# Allegro board Balang_Ctrl_V1_0_20190624.brd
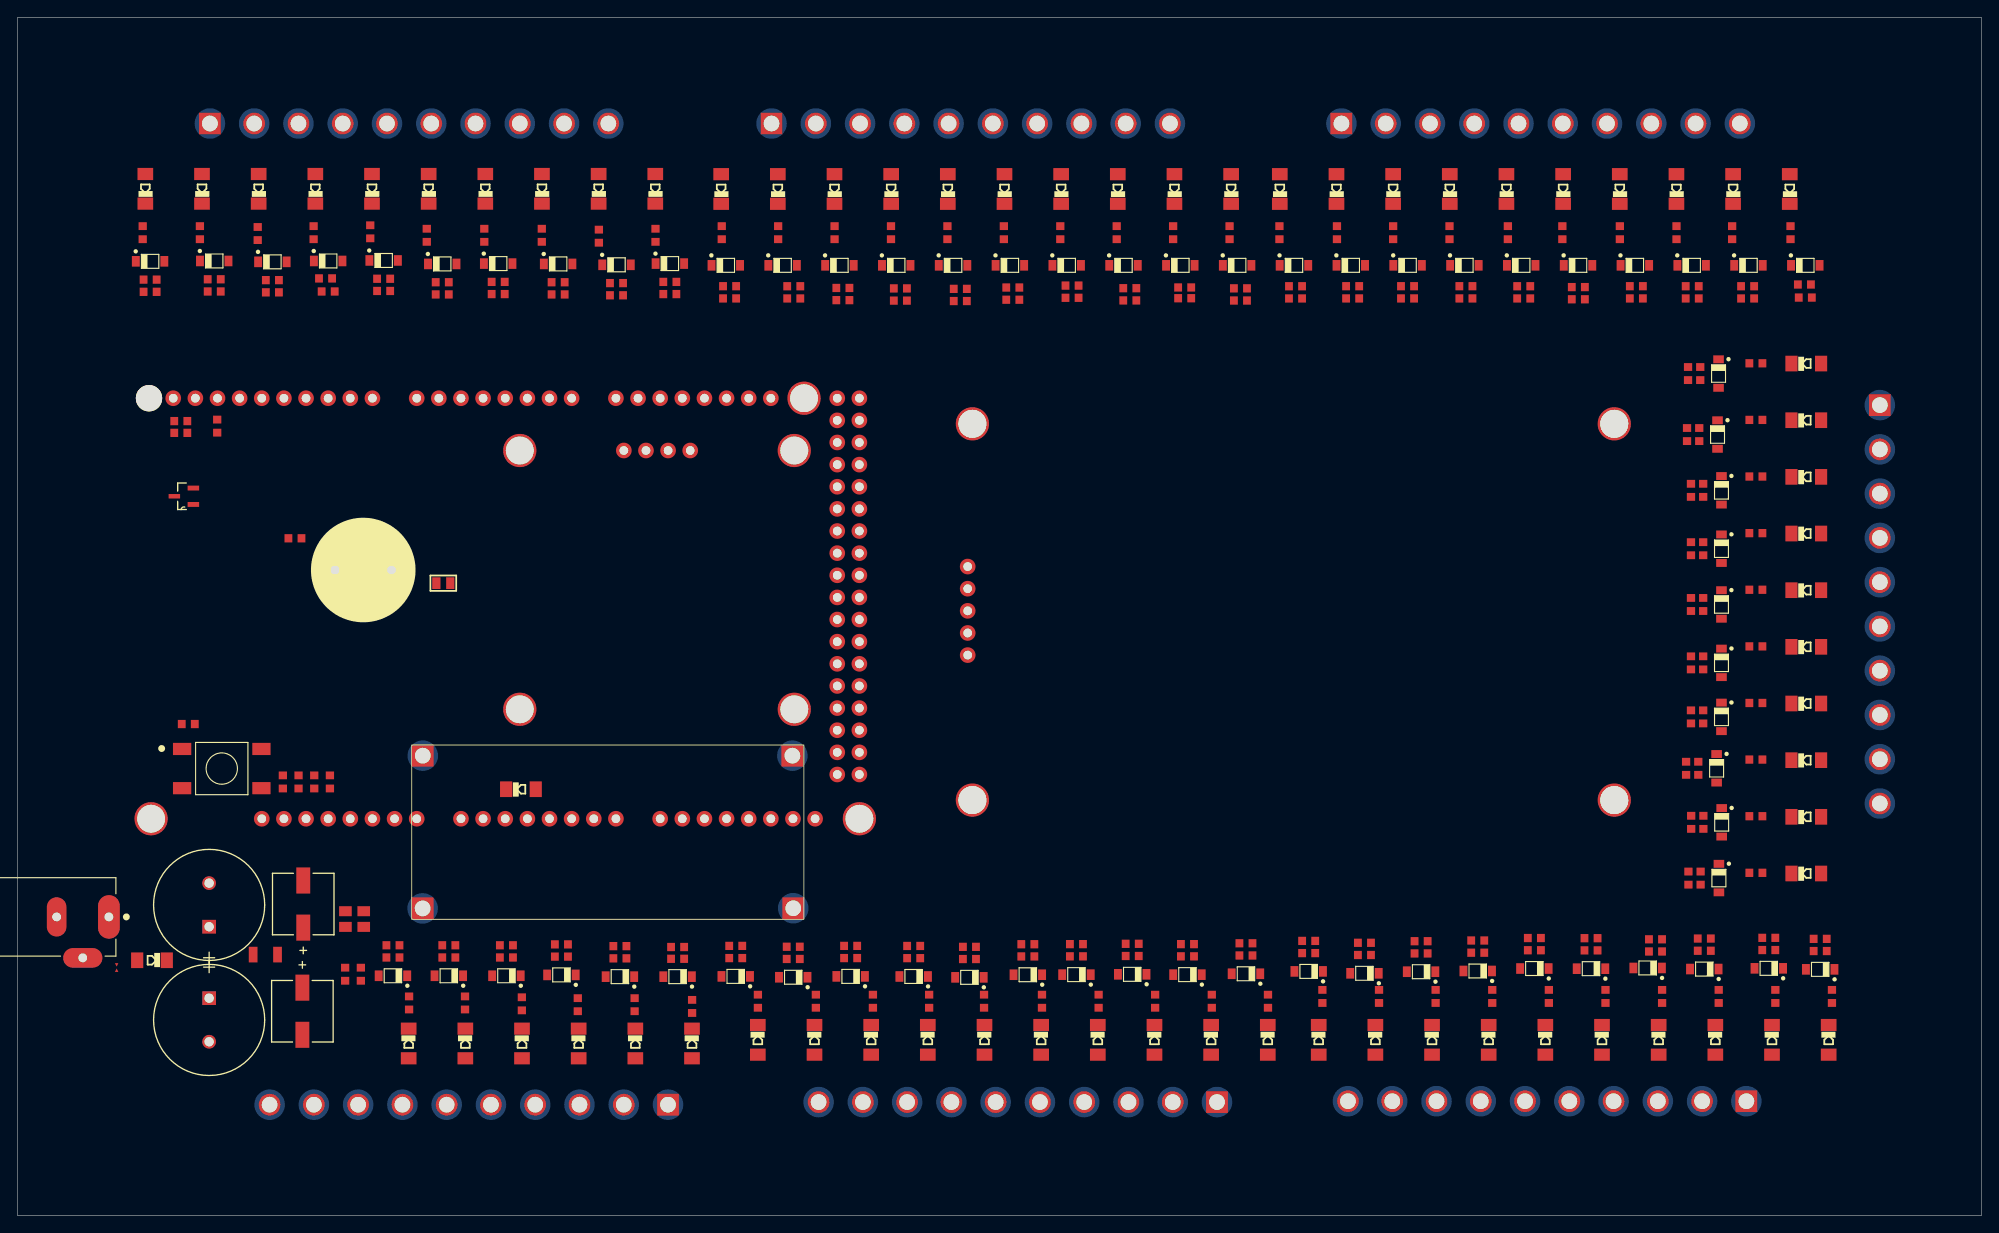
[diagram p0: board, top side]
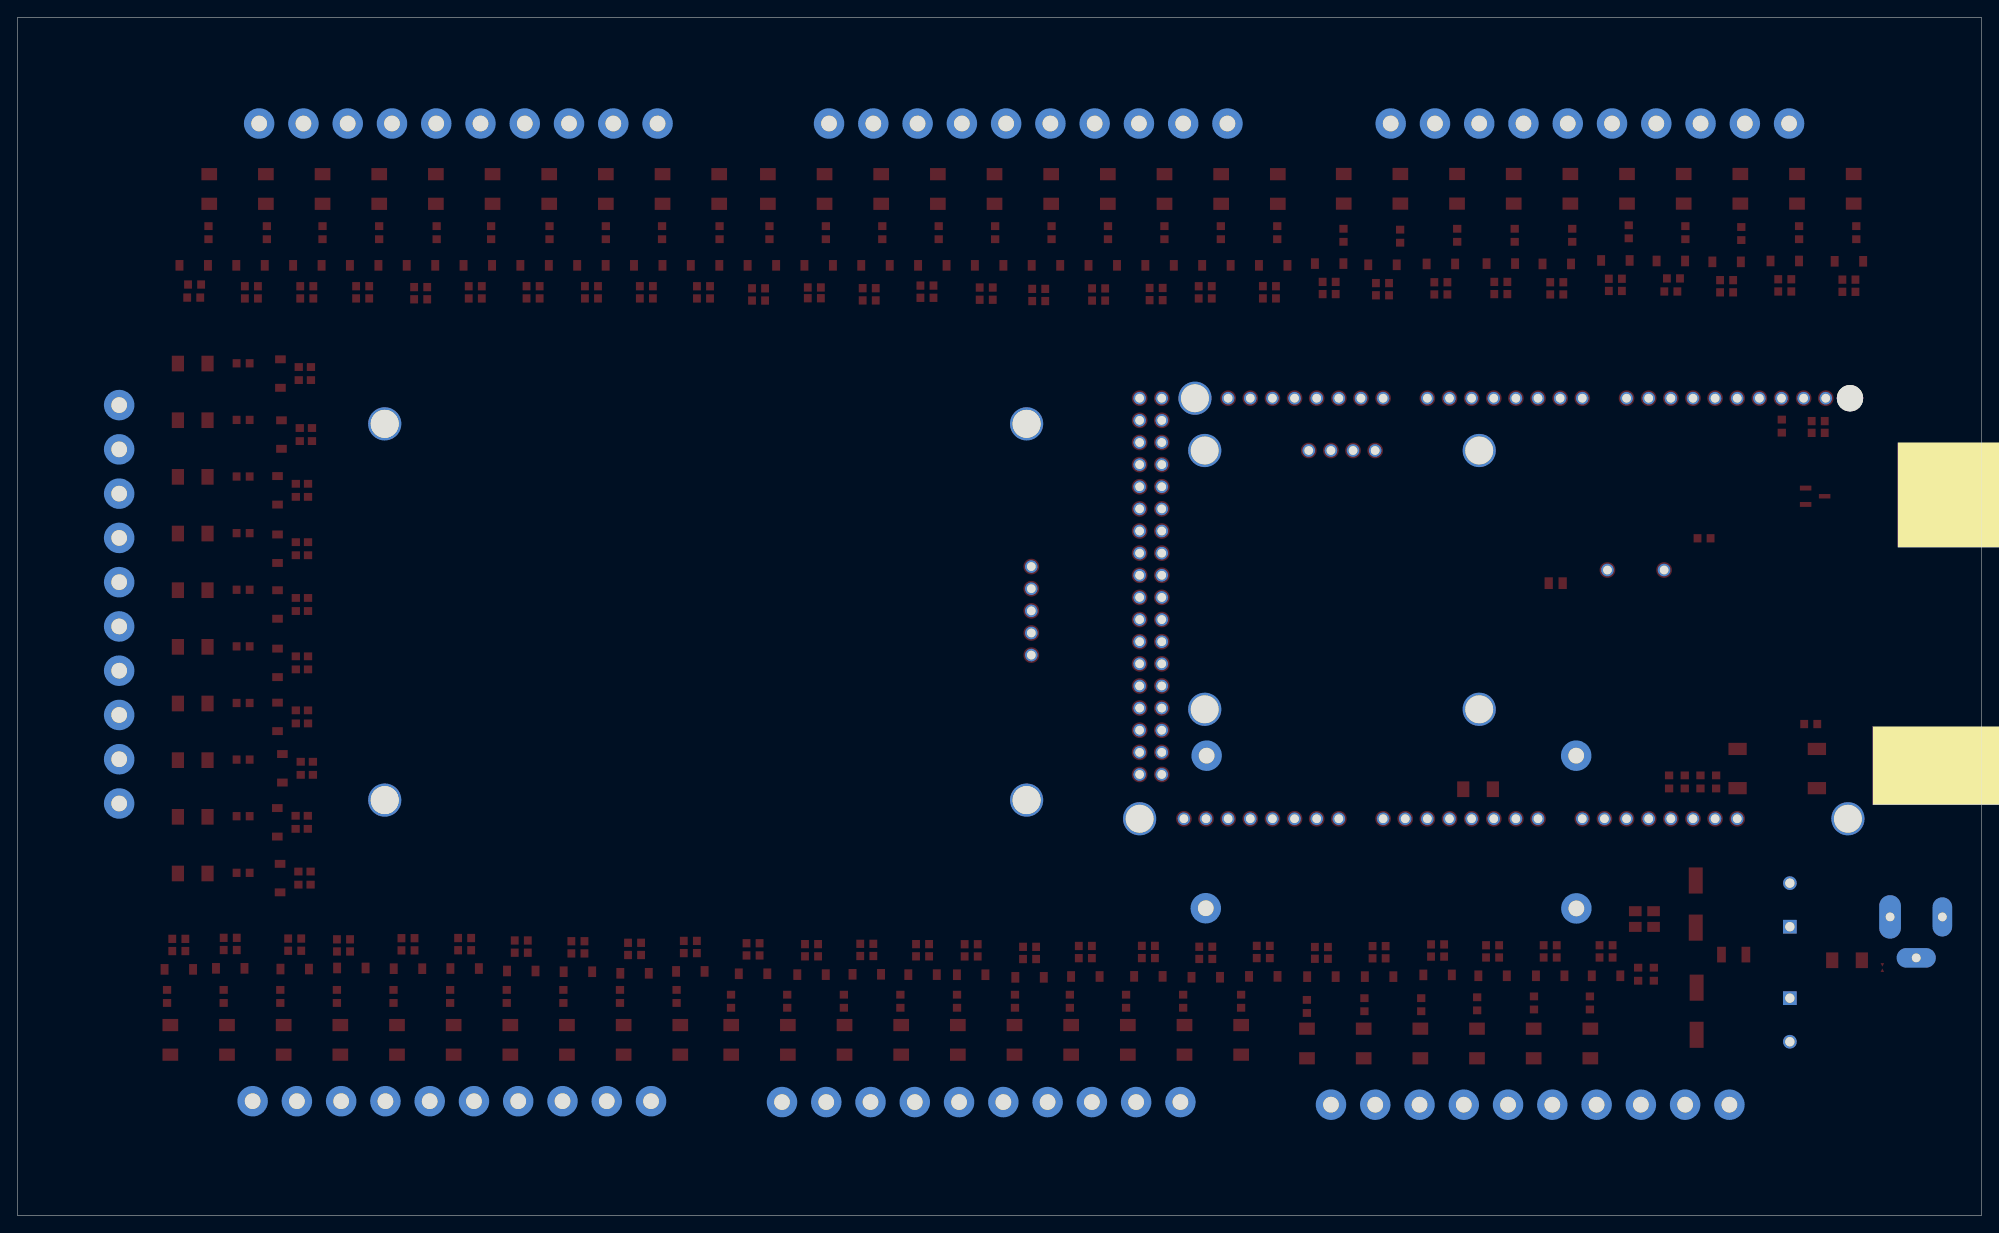
[diagram p1: board, bottom side, seen from below]

Outline 225.4 x 137.5 mm; copper layers: TOP, BOTTOM. Coordinates in mm from the lower left corner of the outline.
Outline path: 0,137.5 0,0 225.4,0 225.4,137.5 0,137.5

## Placement (name value [footprint] x y rotation side)
C1  100n  [CC0603]  19.61 56.41 0 top
C2  100n  [CC0603]  75.76 29.47 180 top
C3  100n  [CC0603]  69.14 29.52 180 top
C4  100n  [CC0603]  62.43 29.72 180 top
C5  100n  [CC0603]  56.12 29.62 180 top
C6  100n  [CC0603]  49.5 29.62 180 top
C7  100n  [CC0603]  43.09 29.62 180 top
C8  100n  [CC0603]  140.98 29.85 180 top
C9  100n  [CC0603]  134.27 29.75 180 top
C10  100n  [CC0603]  127.93 29.79 180 top
C11  100n  [CC0603]  121.53 29.75 180 top
C12  100n  [CC0603]  115.95 29.74 180 top
C13  100n  [CC0603]  109.25 29.44 180 top
C14  100n  [CC0603]  102.85 29.54 180 top
C15  100n  [CC0603]  95.62 29.55 180 top
C16  100n  [CC0603]  89.03 29.45 180 top
C17  100n  [CC0603]  82.43 29.55 180 top
C18  100n  [CC0603]  32.26 49.77 270 top
C19  100n  [CC0603]  34.06 49.77 270 top
C20  1000uF  [U1-Z]  22 24.95 270 top
C21  1000uF  [U1-Z]  22 33.15 90 top
C22  100uF  [PCAP_6P3X7P7-ELECT]  32.8 35.75 90 top
C23  100uF  [PCAP_6P3X7P7-ELECT]  32.7 23.45 270 top
C24  10uF  [CC0805]  39.74 34.03 90 top
C25  10uF  [CC0805]  37.64 34.03 90 top
C26  100n  [CC0603]  39.41 27.7 270 top
C27  100n  [CC0603]  37.61 27.7 270 top
C28  100n  [CC0603]  74.87 107.15 0 top
C29  100n  [CC0603]  68.75 107.01 0 top
C30  100n  [CC0603]  62.05 107.11 0 top
C32  100n  [CC0603]  140.35 106.41 0 top
C33  100n  [CC0603]  148.18 30.12 180 top
C34  100n  [CC0603]  205.07 106.85 0 top
C35  100n  [CC0603]  193.16 38.73 270 top
C36  100n  [CC0603]  55.17 107.15 0 top
C37  100n  [CC0603]  133.95 106.51 0 top
C38  100n  [CC0603]  154.58 29.9 180 top
C39  100n  [CC0603]  198.55 106.65 0 top
C40  100n  [CC0603]  193.48 45.13 270 top
C41  100n  [CC0603]  48.75 107.11 0 top
C42  100n  [CC0603]  127.65 106.42 0 top
C43  100n  [CC0603]  161.08 30.09 180 top
C44  100n  [CC0603]  192.2 106.65 0 top
C45  100n  [CC0603]  192.89 51.33 270 top
C46  100n  [CC0603]  42.02 107.51 0 top
C47  100n  [CC0603]  121.02 106.72 0 top
C48  100n  [CC0603]  167.58 31.57 180 top
C49  100n  [CC0603]  185.78 106.65 0 top
C50  100n  [CC0603]  193.45 57.23 270 top
C51  100n  [CC0603]  35.36 107.55 0 top
C52  100n  [CC0603]  114.22 106.5 0 top
C53  100n  [CC0603]  193.45 63.43 270 top
C54  100n  [CC0603]  174.08 30.45 180 top
C55  100n  [CC0603]  179.12 106.55 0 top
C56  100n  [CC0603]  29.26 107.35 0 top
C57  100n  [CC0603]  108.2 106.35 0 top
C58  100n  [CC0603]  180.58 30.43 180 top
C59  100n  [CC0603]  172.86 106.65 0 top
C60  100n  [CC0603]  193.45 70.13 270 top
C61  100n  [CC0603]  22.58 107.45 0 top
C62  100n  [CC0603]  101.32 106.4 0 top
C63  100n  [CC0603]  187.98 30.31 180 top
C64  100n  [CC0603]  166.22 106.65 0 top
C65  100n  [CC0603]  193.45 76.53 270 top
C66  100n  [CC0603]  15.22 107.41 0 top
C67  100n  [CC0603]  94.72 106.45 0 top
C68  100n  [CC0603]  193.58 30.39 180 top
C69  100n  [CC0603]  159.52 106.65 0 top
C70  100n  [CC0603]  193.45 83.23 270 top
C71  100n  [CC0603]  89.09 106.65 0 top
C72  100n  [CC0603]  200.98 30.47 180 top
C73  100n  [CC0603]  153.22 106.65 0 top
C74  100n  [CC0603]  193 89.63 270 top
C75  100n  [CC0603]  81.72 106.65 0 top
C76  100n  [CC0603]  206.88 30.36 180 top
C77  100n  [CC0603]  146.67 106.65 0 top
C78  100n  [CC0603]  193.12 96.63 270 top
D1  DIODE  [MINIMELF]  77.41 19.75 270 top
D2  DIODE  [MINIMELF]  70.91 19.75 270 top
D3  DIODE  [MINIMELF]  64.41 19.75 270 top
D4  DIODE  [MINIMELF]  57.9 19.75 270 top
D5  DIODE  [MINIMELF]  51.4 19.75 270 top
D6  DIODE  [MINIMELF]  44.9 19.75 270 top
D7  DIODE  [MINIMELF]  143.49 20.17 270 top
D8  DIODE  [MINIMELF]  136.99 20.17 270 top
D9  DIODE  [MINIMELF]  130.48 20.17 270 top
D10  DIODE  [MINIMELF]  123.98 20.17 270 top
D11  DIODE  [MINIMELF]  117.48 20.17 270 top
D12  DIODE  [MINIMELF]  110.98 20.17 270 top
D13  DIODE  [MINIMELF]  104.48 20.17 270 top
D14  DIODE  [MINIMELF]  97.97 20.17 270 top
D15  DIODE  [MINIMELF]  91.47 20.17 270 top
D16  DIODE  [MINIMELF]  84.97 20.17 270 top
D17  ZEN  [SOD3716X117N]  75.76 27.42 180 top
D18  ZEN  [SOD3716X117N]  69.14 27.42 180 top
D19  ZEN  [SOD3716X117N]  62.43 27.62 180 top
D20  ZEN  [SOD3716X117N]  56.12 27.52 180 top
D21  ZEN  [SOD3716X117N]  49.5 27.52 180 top
D22  ZEN  [SOD3716X117N]  43.09 27.52 180 top
D23  ZEN  [SOD3716X117N]  140.98 27.75 180 top
D24  ZEN  [SOD3716X117N]  134.27 27.65 180 top
D25  ZEN  [SOD3716X117N]  127.93 27.69 180 top
D26  ZEN  [SOD3716X117N]  121.53 27.65 180 top
D27  ZEN  [SOD3716X117N]  115.95 27.64 180 top
D28  ZEN  [SOD3716X117N]  109.25 27.34 180 top
D29  ZEN  [SOD3716X117N]  102.85 27.44 180 top
D30  ZEN  [SOD3716X117N]  95.62 27.45 180 top
D31  ZEN  [SOD3716X117N]  89.03 27.35 180 top
D32  ZEN  [SOD3716X117N]  82.43 27.45 180 top
D33  DIODE 34/DD  [MINIMELF]  15.44 29.3 180 top
D34  DIODE  [MINIMELF]  57.78 48.93 0 top
D35  DIODE  [MINIMELF]  73.2 117.83 90 top
D36  ZEN  [SOD3716X117N]  74.87 109.25 0 top
D37  DIODE  [MINIMELF]  66.7 117.83 90 top
D38  ZEN  [SOD3716X117N]  68.75 109.11 0 top
D39  DIODE  [MINIMELF]  60.19 117.83 90 top
D40  ZEN  [SOD3716X117N]  62.05 109.21 0 top
D42  DIODE  [MINIMELF]  139.28 117.81 90 top
D43  DIODE  [MINIMELF]  149.33 20.17 270 top
D44  DIODE  [MINIMELF]  203.39 117.81 90 top
D45  DIODE  [MINIMELF]  205.28 39.26 0 top
D46  ZEN  [SOD3716X117N]  139.97 109.05 0 top
D47  DIODE  [MINIMELF]  53.69 117.83 90 top
D48  ZEN  [SOD3716X117N]  148.18 28.02 180 top
D49  ZEN  [SOD3716X117N]  205.17 109.05 0 top
D50  ZEN  [SOD3716X117N]  195.26 38.73 270 top
D51  ZEN  [SOD3716X117N]  55.17 109.25 0 top
D52  DIODE  [MINIMELF]  132.78 117.81 90 top
D53  DIODE  [MINIMELF]  196.89 117.81 90 top
D54  DIODE  [MINIMELF]  155.83 20.17 270 top
D55  DIODE  [MINIMELF]  205.28 45.76 0 top
D56  ZEN  [SOD3716X117N]  133.45 109.05 0 top
D57  DIODE  [MINIMELF]  47.19 117.83 90 top
D58  ZEN  [SOD3716X117N]  154.58 27.8 180 top
D59  ZEN  [SOD3716X117N]  198.65 109.05 0 top
D60  ZEN  [SOD3716X117N]  195.58 45.13 270 top
D61  ZEN  [SOD3716X117N]  48.75 109.21 0 top
D62  DIODE  [MINIMELF]  126.28 117.81 90 top
D63  DIODE  [MINIMELF]  162.34 20.17 270 top
D64  DIODE  [MINIMELF]  190.38 117.81 90 top
D65  DIODE  [MINIMELF]  205.28 52.26 0 top
D66  ZEN  [SOD3716X117N]  126.93 109.05 0 top
D67  DIODE  [MINIMELF]  40.69 117.83 90 top
D68  ZEN  [SOD3716X117N]  161.08 27.99 180 top
D69  ZEN  [SOD3716X117N]  192.13 109.05 0 top
D70  ZEN  [SOD3716X117N]  194.99 51.33 270 top
D71  ZEN  [SOD3716X117N]  42.02 109.61 0 top
D72  DIODE  [MINIMELF]  119.77 117.81 90 top
D73  DIODE  [MINIMELF]  168.84 20.17 270 top
D74  DIODE  [MINIMELF]  183.88 117.81 90 top
D75  DIODE  [MINIMELF]  205.28 58.77 0 top
D76  ZEN  [SOD3716X117N]  120.41 109.05 0 top
D77  DIODE  [MINIMELF]  34.19 117.83 90 top
D78  ZEN  [SOD3716X117N]  167.58 28.07 180 top
D79  ZEN  [SOD3716X117N]  185.61 109.05 0 top
D80  ZEN  [SOD3716X117N]  195.55 57.23 270 top
D81  ZEN  [SOD3716X117N]  35.66 109.55 0 top
D82  DIODE  [MINIMELF]  113.27 117.81 90 top
D83  DIODE  [MINIMELF]  205.28 65.27 0 top
D84  DIODE  [MINIMELF]  175.34 20.17 270 top
D85  DIODE  [MINIMELF]  177.38 117.81 90 top
D86  ZEN  [SOD3716X117N]  113.89 109.05 0 top
D87  DIODE  [MINIMELF]  27.68 117.83 90 top
D88  ZEN  [SOD3716X117N]  174.08 28.35 180 top
D89  ZEN  [SOD3716X117N]  179.09 109.05 0 top
D90  ZEN  [SOD3716X117N]  195.55 63.43 270 top
D91  ZEN  [SOD3716X117N]  29.26 109.45 0 top
D92  DIODE  [MINIMELF]  106.77 117.81 90 top
D93  DIODE  [MINIMELF]  181.84 20.17 270 top
D94  DIODE  [MINIMELF]  170.88 117.81 90 top
D95  DIODE  [MINIMELF]  205.28 71.77 0 top
D96  ZEN  [SOD3716X117N]  107.37 109.05 0 top
D97  DIODE  [MINIMELF]  21.18 117.83 90 top
D98  ZEN  [SOD3716X117N]  180.58 28.33 180 top
D99  ZEN  [SOD3716X117N]  172.57 109.05 0 top
D100  ZEN  [SOD3716X117N]  195.55 70.13 270 top
D101  ZEN  [SOD3716X117N]  22.58 109.55 0 top
D102  DIODE  [MINIMELF]  100.27 117.81 90 top
D103  DIODE  [MINIMELF]  188.35 20.17 270 top
D104  DIODE  [MINIMELF]  164.37 117.81 90 top
D105  DIODE  [MINIMELF]  205.28 78.27 0 top
D106  ZEN  [SOD3716X117N]  100.85 109.05 0 top
D107  DIODE  [MINIMELF]  14.68 117.83 90 top
D108  ZEN  [SOD3716X117N]  187.08 28.41 180 top
D109  ZEN  [SOD3716X117N]  166.05 109.05 0 top
D110  ZEN  [SOD3716X117N]  195.55 76.53 270 top
D111  ZEN  [SOD3716X117N]  15.22 109.51 0 top
D113  DIODE  [MINIMELF]  93.76 117.81 90 top
D114  DIODE  [MINIMELF]  194.85 20.17 270 top
D115  DIODE  [MINIMELF]  157.87 117.81 90 top
D116  DIODE  [MINIMELF]  205.28 84.77 0 top
D117  ZEN  [SOD3716X117N]  94.33 109.05 0 top
D118  ZEN  [SOD3716X117N]  193.58 28.29 180 top
D119  ZEN  [SOD3716X117N]  159.53 109.05 0 top
D120  ZEN  [SOD3716X117N]  195.55 83.23 270 top
D121  DIODE  [MINIMELF]  87.26 117.81 90 top
D122  DIODE  [MINIMELF]  201.35 20.17 270 top
D123  DIODE  [MINIMELF]  151.37 117.81 90 top
D125  DIODE  [MINIMELF]  205.28 91.28 0 top
D126  ZEN  [SOD3716X117N]  87.81 109.05 0 top
D127  ZEN  [SOD3716X117N]  200.98 28.37 180 top
D128  ZEN  [SOD3716X117N]  153.01 109.05 0 top
D129  ZEN  [SOD3716X117N]  195.1 89.63 270 top
D130  DIODE  [MINIMELF]  80.76 117.81 90 top
D131  DIODE  [MINIMELF]  207.85 20.17 270 top
D132  DIODE  [MINIMELF]  144.87 117.81 90 top
D133  DIODE  [MINIMELF]  205.28 97.78 0 top
D134  ZEN  [SOD3716X117N]  81.29 109.05 0 top
D135  ZEN  [SOD3716X117N]  206.88 28.26 180 top
D136  ZEN  [SOD3716X117N]  146.49 109.05 0 top
D137  ZEN  [SOD3716X117N]  195.22 96.63 270 top
F2  1206L012WR  [FUSER_1206L012WR]  28.45 29.95 0 top
J1  TerminalBlock  [TERMINALBLOCK508]  89.9 12.73 180 top
J2  TerminalBlock  [TERMINALBLOCK508]  152.9 13.02 180 top
J3  Rst  [SW_5-1437565-0]  23.45 51.3 0 top
J4  TerminalBlock  [TERMINALBLOCK508]  6.85 125.32 0 top
J5  TerminalBlock  [TERMINALBLOCK508]  213.65 13.12 180 top
J6  TerminalBlock  [TERMINALBLOCK508]  213.73 108.25 270 top
J7  TerminalBlock  [TERMINALBLOCK508]  136.7 125.32 0 top
J8  TerminalBlock  [TERMINALBLOCK508]  71.3 125.32 0 top
K1  CAP_KeyPad  [CAP_KEYPAD]  107.05 93.4 270 top
L1  OLED  [OLED_1_3INCH]  55.65 56.1 0 top
LS1  BUZZER  [BUZZER5V]  36.43 74.09 0 top
NOREF  -  []  -160.45 -203.35 0 top
Q1  IRF150  [SOT95P237X112-3N]  19.1 82.55 180 top
R1  100k  [RC0603]  35.86 49.77 270 top
R2  100k  [RC0603]  22.93 90.6 90 top
R3  1k  [RC0603]  77.42 24 270 top
R4  1k  [RC0603]  70.83 24.2 270 top
R5  1k  [RC0603]  64.31 24.2 270 top
R6  1k  [RC0603]  57.89 24.3 270 top
R7  1k  [RC0603]  51.37 24.4 270 top
R8  1k  [RC0603]  44.95 24.4 270 top
R9  1k  [RC0603]  143.51 24.6 270 top
R10  1k  [RC0603]  137.06 24.6 270 top
R11  1k  [RC0603]  130.56 24.6 270 top
R12  1k  [RC0603]  124.08 24.6 270 top
R13  1k  [RC0603]  117.58 24.6 270 top
R14  1k  [RC0603]  110.93 24.6 270 top
R15  1k  [RC0603]  104.62 24.6 270 top
R16  1k  [RC0603]  98.18 24.6 270 top
R17  1k  [RC0603]  91.62 24.6 270 top
R18  1k  [RC0603]  84.97 24.6 270 top
R19  R  [RC0603]  75.76 30.82 0 top
R20  R  [RC0603]  69.14 30.92 0 top
R21  R  [RC0603]  62.43 31.12 0 top
R22  R  [RC0603]  56.12 31.02 0 top
R23  R  [RC0603]  49.5 31.02 0 top
R24  R  [RC0603]  43.09 31.02 0 top
R25  R  [RC0603]  140.98 31.25 0 top
R26  R  [RC0603]  134.27 31.15 0 top
R27  R  [RC0603]  127.93 31.19 0 top
R28  R  [RC0603]  121.53 31.15 0 top
R29  R  [RC0603]  115.95 31.14 0 top
R30  R  [RC0603]  109.25 30.84 0 top
R31  R  [RC0603]  102.85 30.94 0 top
R32  R  [RC0603]  95.62 30.95 0 top
R33  R  [RC0603]  89.03 30.85 0 top
R34  R  [RC0603]  82.43 30.95 0 top
R35  10R  [RC0805]  48.87 72.58 0 top
R36  10k  [RC0603]  18.75 89.83 0 top
R37  R  [RC0603]  74.87 105.75 180 top
R38  1k  [RC0603]  73.23 112.5 90 top
R39  10k  [RC0603]  18.75 91.17 0 top
R40  10k  [RC0603]  31.85 77.72 0 top
R41  100k  [RC0603]  68.75 105.61 180 top
R42  1k  [RC0603]  66.73 112.4 90 top
R43  100k  [RC0603]  62.05 105.71 180 top
R44  1k  [RC0603]  60.18 112.5 90 top
R46  R  [RC0603]  140.35 105.01 180 top
R47  R  [RC0603]  148.18 31.52 0 top
R48  R  [RC0603]  205.17 105.35 180 top
R49  R  [RC0603]  191.76 38.73 90 top
R50  1k  [RC0603]  139.1 112.8 90 top
R51  100k  [RC0603]  55.17 105.75 180 top
R52  1k  [RC0603]  149.76 25.15 270 top
R53  1k  [RC0603]  203.48 112.8 90 top
R54  1k  [RC0603]  199.5 39.33 0 top
R55  1k  [RC0603]  53.58 112.5 90 top
R56  100k  [RC0603]  133.95 105.28 180 top
R57  100k  [RC0603]  154.58 31.3 0 top
R58  100k  [RC0603]  198.55 105.25 180 top
R59  100k  [RC0603]  192.08 45.13 90 top
R60  1k  [RC0603]  132.62 112.8 90 top
R61  100k  [RC0603]  48.75 105.71 180 top
R62  1k  [RC0603]  156.25 25.15 270 top
R63  1k  [RC0603]  196.77 112.8 90 top
R64  1k  [RC0603]  199.5 45.83 0 top
R65  1k  [RC0603]  46.98 112.5 90 top
R66  100k  [RC0603]  127.65 105.03 180 top
R67  100k  [RC0603]  161.08 31.49 0 top
R68  100k  [RC0603]  192.2 105.25 180 top
R69  100k  [RC0603]  191.49 51.33 90 top
R70  1k  [RC0603]  126.15 112.8 90 top
R71  100k  [RC0603]  42.02 106.11 180 top
R72  1k  [RC0603]  162.75 25.15 270 top
R73  1k  [RC0603]  190.39 112.8 90 top
R74  1k  [RC0603]  199.5 52.33 0 top
R75  1k  [RC0603]  40.49 112.9 90 top
R76  100k  [RC0603]  121.02 105.33 180 top
R77  100k  [RC0603]  167.58 30.17 0 top
R78  100k  [RC0603]  185.78 105.25 180 top
R79  100k  [RC0603]  192.05 57.23 90 top
R80  1k  [RC0603]  119.68 112.8 90 top
R81  100k  [RC0603]  35.66 106.05 180 top
R82  1k  [RC0603]  169.25 25.15 270 top
R83  1k  [RC0603]  183.89 112.8 90 top
R84  1k  [RC0603]  199.5 58.83 0 top
R85  1k  [RC0603]  33.99 112.8 90 top
R86  100k  [RC0603]  174.08 31.85 0 top
R87  1k  [RC0603]  175.74 25.15 270 top
R88  100k  [RC0603]  114.22 105.1 180 top
R89  100k  [RC0603]  192.05 63.43 90 top
R90  1k  [RC0603]  113.2 112.8 90 top
R91  100k  [RC0603]  29.26 105.95 180 top
R92  100k  [RC0603]  179.12 105.15 180 top
R93  1k  [RC0603]  177.29 112.8 90 top
R94  1k  [RC0603]  199.5 65.32 0 top
R95  1k  [RC0603]  27.58 112.7 90 top
R96  100k  [RC0603]  108.2 104.95 180 top
R97  100k  [RC0603]  180.58 31.83 0 top
R98  100k  [RC0603]  172.86 105.25 180 top
R99  100k  [RC0603]  192.05 70.13 90 top
R100  1k  [RC0603]  106.72 112.8 90 top
R101  100k  [RC0603]  22.58 106.05 180 top
R102  1k  [RC0603]  182.24 25.15 270 top
R103  1k  [RC0603]  171.04 112.8 90 top
R104  1k  [RC0603]  199.5 71.82 0 top
R105  1k  [RC0603]  20.94 112.8 90 top
R106  100k  [RC0603]  101.32 105 180 top
R107  100k  [RC0603]  187.98 31.7 0 top
R108  100k  [RC0603]  166.22 105.25 180 top
R109  100k  [RC0603]  192.05 76.53 90 top
R110  1k  [RC0603]  100.25 112.8 90 top
R111  100k  [RC0603]  15.22 106.01 180 top
R112  1k  [RC0603]  188.74 25.15 270 top
R113  1k  [RC0603]  164.34 112.8 90 top
R114  1k  [RC0603]  199.5 78.32 0 top
R115  1k  [RC0603]  14.38 112.8 90 top
R117  100k  [RC0603]  94.72 105.05 180 top
R118  100k  [RC0603]  193.58 31.79 0 top
R119  100k  [RC0603]  159.52 105.25 180 top
R120  100k  [RC0603]  192.05 83.23 90 top
R121  1k  [RC0603]  93.78 112.8 90 top
R122  1k  [RC0603]  195.24 25.15 270 top
R123  1k  [RC0603]  157.88 112.8 90 top
R124  1k  [RC0603]  199.5 84.81 0 top
R125  100k  [RC0603]  89.09 105.25 180 top
R126  100k  [RC0603]  200.98 31.87 0 top
R127  100k  [RC0603]  153.22 105.25 180 top
R128  100k  [RC0603]  191.6 89.63 90 top
R129  1k  [RC0603]  87.3 112.8 90 top
R130  1k  [RC0603]  201.73 25.15 270 top
R131  1k  [RC0603]  151.43 112.8 90 top
R132  1k  [RC0603]  199.5 91.31 0 top
R133  100k  [RC0603]  81.72 105.25 180 top
R134  100k  [RC0603]  206.88 31.76 0 top
R135  100k  [RC0603]  146.67 105.25 180 top
R136  100k  [RC0603]  191.72 96.63 90 top
R137  1k  [RC0603]  80.83 112.8 90 top
R138  1k  [RC0603]  208.23 25.15 270 top
R139  1k  [RC0603]  144.82 112.8 90 top
R140  1k  [RC0603]  199.5 97.81 0 top
R141  100k  [RC0603]  30.46 49.77 90 top
U1  Atmega2560  [ATMEGA2560_1]  0.1 43 0 top
U2  Power_Supply_Con  [CUI_PJ-035D]  10.5 34.27 180 top
U3  LM2596  [LM2596_MODULE]  45.25 34 0 top
V2  SPARK GAP  [SPARK_GAP]  11.39 28.47 270 top

## Library data of the parts
C1 C18 C19 C26 C27 = CAP NP_0
C2-C17 = C_0
C20-C25 = CAP
C28-C30 C32-C78 = CAP NP
D1-D16 D34 D35 D37 D39 D42-D45 D47 D52-D55 D57 D62-D65 D67 D72-D75 D77 D82-D85 D87 D92-D95 D97 D102-D105 D107 D113-D116 D121-D123 D125 D130-D133 = DIODE_6
D17-D32 D36 D38 D40 D46 D48-D51 D56 D58-D61 D66 D68-D71 D76 D78-D81 D86 D88-D91 D96 D98-D101 D106 D108-D111 D117-D120 D126-D129 D134-D137 = ZENER_AK_6
D33 = DIODE 34/DD_0
F2 = FUSE
J1 J2 J4-J8 = Terminal_Block_0
J3 = Rst
K1 = Cap_KeyPad
L1 = OLED_Module
LS1 = BUZZER
Q1 = BUZ84A
R1-R44 R46-R115 R117-R141 = R
U1 = Atmega2560_Shield_1
U2 = Power_Supply_Con
U3 = LM2596_Module
V2 = SPARK GAP

## Footprints (pads in the part's own frame, mm; a bottom-side part is the same pattern mirrored in y, then rotated)
ATMEGA2560_1
  round 3.023 hole 3.023 unplated: (15,50.8)
  round 3.81 hole 3.2 unplated: (15.24,2.54) (90.17,50.8) (96.52,2.54)
  round 1.8 hole 1: 1(60.96,50.8) 2(58.42,50.8) 3(55.88,50.8) 4(53.34,50.8) 5(50.8,50.8) 6(48.26,50.8) 7(45.72,50.8) 8(40.64,50.8) 9(38.1,50.8) 10(35.56,50.8) 11(33.02,50.8) 12(30.48,50.8) 13(27.94,50.8) 14(68.58,50.8) 15(71.12,50.8) 16(73.66,50.8) 17(76.2,50.8) 18(78.74,50.8) 19(81.28,50.8) 20(83.82,50.8) 21(86.36,50.8) 22(93.98,48.26) 23(96.52,48.26) 24(93.98,45.72) 25(96.52,45.72) 26(93.98,43.18) 27(96.52,43.18) 28(93.98,40.64) 29(96.52,40.64) 30(93.98,38.1) 31(96.52,38.1) 32(93.98,35.56) 33(96.52,35.56) 34(93.98,33.02) 35(96.52,33.02) 36(93.98,30.48) 37(96.52,30.48) 38(93.98,27.94) 39(96.52,27.94) 40(93.98,25.4) 41(96.52,25.4) 42(93.98,22.86) 43(96.52,22.86) 44(93.98,20.32) 45(96.52,20.32) 46(93.98,17.78) 47(96.52,17.78) 48(93.98,15.24) 49(96.52,15.24) 50(93.98,12.7) 51(96.52,12.7) 52(93.98,10.16) 53(96.52,10.16) 54(50.8,2.54) 55(53.34,2.54) 56(55.88,2.54) 57(58.42,2.54) 58(60.96,2.54) 59(63.5,2.54) 60(66.04,2.54) 61(68.58,2.54) 62(73.66,2.54) 63(76.2,2.54) 64(78.74,2.54) 65(81.28,2.54) 66(83.82,2.54) 67(86.36,2.54) 68(88.9,2.54) 69(91.44,2.54) 70(27.94,2.54) 71(30.48,2.54) 72(33.02,2.54) 73(35.56,2.54) 74(38.1,2.54) 75(40.64,2.54) 76(43.18,2.54) 77(45.72,2.54) 78(25.4,50.8) 79(22.86,50.8) 80(20.32,50.8) 81(17.78,50.8) 82(93.98,50.8) 83(96.52,50.8) 84(93.98,7.62) 85(96.52,7.62) 86(63.5,50.8)
BUZZER5V
  round 1.8 hole 1: 1(0,0) 2(6.5,0)
CAP_KEYPAD
  round 3.81 hole 3.2 unplated: (2.54,76.2) (2.54,2.54) (45.72,76.2) (45.72,2.54)
  round 1.8 hole 1: 1(29.08,2) 2(26.54,2) 3(24,2) 4(21.46,2) 5(18.92,2)
CC0603
  rect 0.9x0.95 smd: 1(-0.75,0) 2(0.75,0)
CC0805
  rect 1.15x1.45 smd: 1(-0.9,0) 2(0.9,0)
CUI_PJ-035D
  oval 2.5x5 hole 1: 1(0,0)
  oval 2.25x4.5 hole 1: 2(6,0)
  oval 4.5x2.25 hole 1: 3(3,4.7)
FUSER_1206L012WR
  rect 1x1.8 smd: 1(-1.4,0) 2(1.4,0)
LM2596_MODULE
  rect 2.5x2.5 hole 1.8: 1(1.27,18.78) 2(1.25,1.25) 3(43.78,1.27) 4(43.68,18.78)
MINIMELF
  rect 1.4x1.8 smd: A(1.7,0) C(-1.7,0)
OLED_1_3INCH
  round 3.81 hole 3.2 unplated: (2,31.7) (2,2) (33.5,31.7) (33.5,2)
  round 1.8 hole 1: 1(13.94,31.7) 2(16.48,31.7) 3(19.02,31.7) 4(21.56,31.7)
PCAP_6P3X7P7-ELECT
  rect 2.997x1.6 smd: 1(-2.705,0) 2(2.705,0)
RC0603
  rect 0.9x0.95 smd: 1(-0.75,0) 2(0.75,0)
RC0805
  rect 0.95x1.35 smd: 1(-0.8,0) 2(0.8,0)
SOD3716X117N
  rect 0.91x1.22 smd: A(1.635,0) C(-1.635,0)
SOT95P237X112-3N
  rect 1.321x0.559 smd: 1(-1.092,0.94) 2(-1.092,-0.94)
  rect 1.321x0.508 smd: 3(1.092,0)
SPARK_GAP
  custom 0.4x0.4 smd: 1(-0.305,0) 2(0.305,0)
SW_5-1437565-0
  rect 2.1x1.4 smd: 1(-4.55,2.25) 2(4.55,2.25) 3(-4.55,-2.25) 4(4.55,-2.25)
TERMINALBLOCK508
  rect 2.5x2.5 hole 1.8: 1(15.24,0)
  round 2.5 hole 1.8: 2(20.32,0) 3(25.4,0) 4(30.48,0) 5(35.56,0) 6(40.64,0) 7(45.72,0) 8(50.8,0) 9(55.88,0) 10(60.96,0)
U1-Z
  rect 1.575x1.575 hole 1.067: 1(0,0)
  round 1.575 hole 1.067: 2(5.004,0)

## Nets
5V: C18.1 C19.1 D34.C(K) K1.1(VCC) L1.1(VCC) R1.1 R2.1 R35.2 R36.2 R39.2 R141.2 U1.74(5V) U1.82(5V_2) U1.83(5V_1)
GND: C1.2 C8.2 C9.2 C10.2 C11.2 C12.2 C13.2 C14.2 C15.2 C16.2 C17.2 C18.2 C19.2 C20.2 C21.2 C22.2 C23.2 C24.2 C25.2 C26.2 C27.2 C28.2 C29.2 C30.2 C32.2 C33.2 C34.2 C35.2 C36.2 C37.2 C38.2 C39.2 C40.2 C41.2 C42.2 C43.2 C44.2 C45.2 C46.2 C47.2 C48.2 C49.2 C50.2 C51.2 C52.2 C53.2 C54.2 C55.2 C56.2 C57.2 C58.2 C59.2 C60.2 C61.2 C62.2 C63.2 C64.2 C65.2 C66.2 C67.2 C68.2 C69.2 C70.2 C71.2 C72.2 C73.2 C74.2 C75.2 C76.2 C77.2 C78.2 D23.A(ANODE) D24.A(ANODE) D25.A(ANODE) D26.A(ANODE) D27.A(ANODE) D28.A(ANODE) D29.A(ANODE) D30.A(ANODE) D31.A(ANODE) D32.A(ANODE) D36.A(ANODE) D38.A(ANODE) D40.A(ANODE) D46.A(ANODE) D48.A(ANODE) D49.A(ANODE) D50.A(ANODE) D51.A(ANODE) D56.A(ANODE) D58.A(ANODE) D59.A(ANODE) D60.A(ANODE) D61.A(ANODE) D66.A(ANODE) D68.A(ANODE) D69.A(ANODE) D70.A(ANODE) D71.A(ANODE) D76.A(ANODE) D78.A(ANODE) D79.A(ANODE) D80.A(ANODE) D81.A(ANODE) D86.A(ANODE) D88.A(ANODE) D89.A(ANODE) D90.A(ANODE) D91.A(ANODE) D96.A(ANODE) D98.A(ANODE) D99.A(ANODE) D100.A(ANODE) D101.A(ANODE) D106.A(ANODE) D108.A(ANODE) D109.A(ANODE) D110.A(ANODE) D111.A(ANODE) D117.A(ANODE) D118.A(ANODE) D119.A(ANODE) D120.A(ANODE) D126.A(ANODE) D127.A(ANODE) D128.A(ANODE) D129.A(ANODE) D134.A(ANODE) D135.A(ANODE) D136.A(ANODE) D137.A(ANODE) J1.9 J1.10 J3.4 K1.5(GND) L1.2(GND) Q1.2(SOURCE) R25.1 R26.1 R27.1 R28.1 R29.1 R30.1 R31.1 R32.1 R33.1 R34.1 R37.1 R41.1 R43.1 R46.1 R47.1 R48.1 R49.1 R51.1 R56.1 R57.1 R58.1 R59.1 R61.1 R66.1 R67.1 R68.1 R69.1 R71.1 R76.1 R77.1 R78.1 R79.1 R81.1 R86.1 R88.1 R89.1 R91.1 R92.1 R96.1 R97.1 R98.1 R99.1 R101.1 R106.1 R107.1 R108.1 R109.1 R111.1 R117.1 R118.1 R119.1 R120.1 R125.1 R126.1 R127.1 R128.1 R133.1 R134.1 R135.1 R136.1 U1.70(NC) U1.75(GND_1) U1.76(GND_2) U1.78(GND_3) U1.84(GND_4) U1.85(GND_5) U2.2 U2.3 U3.2(IN_N) U3.3(OUT_N) V2.2
VCC_12V: J1.7 J1.8 U1.77(VIN)
VIN: C23.1 C24.1 C25.1 C26.1 C27.1 F2.2 U3.1(IN_P)
A0: C7.1 D22.C(CATHODE) R8.1 R24.2 U1.54(D54/A0)
A1: C6.1 D21.C(CATHODE) R7.1 R23.2 U1.55(D55/A1)
A2: C5.1 D20.C(CATHODE) R6.1 R22.2 U1.56(D56/A2)
A3: C4.1 D19.C(CATHODE) R5.1 R21.2 U1.57(D57/A3)
A4: C3.1 D18.C(CATHODE) R4.1 R20.2 U1.58(D58/A4)
A5: C2.1 D17.C(CATHODE) R3.1 R19.2 U1.59(D59/A5)
A6: C17.1 D32.C(CATHODE) R18.1 R34.2 U1.60(D60/A6)
A7: C16.1 D31.C(CATHODE) R17.1 R33.2 U1.61(D61/A7)
A8: C15.1 D30.C(CATHODE) R16.1 R32.2 U1.62(D62/A8)
A9: C14.1 D29.C(CATHODE) R15.1 R31.2 U1.63(D63/A9)
A10: C13.1 D28.C(CATHODE) R14.1 R30.2 U1.64(D64/A10)
A11: C12.1 D27.C(CATHODE) R13.1 R29.2 U1.65(D65/A11)
A12: C11.1 D26.C(CATHODE) R12.1 R28.2 U1.66(D66/A12)
A13: C10.1 D25.C(CATHODE) R11.1 R27.2 U1.67(D67/A13)
A14: C9.1 D24.C(CATHODE) R10.1 R26.2 U1.68(D68/A14)
A15: C8.1 D23.C(CATHODE) R9.1 R25.2 U1.69(D69/A15)
BUZ: R40.1 U1.3(D3)
D0: U1.86(D0/RX0)
D1: U1.1(D1/TX0)
D4: C28.1 D36.C(CATHODE) R37.2 R38.1 U1.4(D4)
D5: C29.1 D38.C(CATHODE) R41.2 R42.1 U1.5(D5)
D6: C30.1 D40.C(CATHODE) R43.2 R44.1 U1.6(D6)
D7: C36.1 D51.C(CATHODE) R51.2 R55.1 U1.7(D7)
D8: C41.1 D61.C(CATHODE) R61.2 R65.1 U1.8(D8)
D9: C46.1 D71.C(CATHODE) R71.2 R75.1 U1.9(D9)
D10: C51.1 D81.C(CATHODE) R81.2 R85.1 U1.10(D10)
D11: C56.1 D91.C(CATHODE) R91.2 R95.1 U1.11(D11)
D12: C61.1 D101.C(CATHODE) R101.2 R105.1 U1.12(D12)
D13: C66.1 D111.C(CATHODE) R111.2 R115.1 U1.13(D13)
D14: C75.1 D134.C(CATHODE) R133.2 R137.1 U1.14(D14)
D15: C71.1 D126.C(CATHODE) R125.2 R129.1 U1.15(D15)
D16: C67.1 D117.C(CATHODE) R117.2 R121.1 U1.16(D16)
D17: C62.1 D106.C(CATHODE) R106.2 R110.1 U1.17(D17)
D18: C57.1 D96.C(CATHODE) R96.2 R100.1 U1.18(D18)
D19: C52.1 D86.C(CATHODE) R88.2 R90.1 U1.19(D19)
D20: C47.1 D76.C(CATHODE) R76.2 R80.1 U1.20(D20)
D21: C42.1 D66.C(CATHODE) R66.2 R70.1 U1.21(D21)
D22: C37.1 D56.C(CATHODE) R56.2 R60.1 U1.22(D22)
D23: C32.1 D46.C(CATHODE) R46.2 R50.1 U1.23(D23)
D24: C77.1 D136.C(CATHODE) R135.2 R139.1 U1.24(D24)
D25: C73.1 D128.C(CATHODE) R127.2 R131.1 U1.25(D25)
D26: C69.1 D119.C(CATHODE) R119.2 R123.1 U1.26(D26)
D27: C64.1 D109.C(CATHODE) R108.2 R113.1 U1.27(D27)
D28: C59.1 D99.C(CATHODE) R98.2 R103.1 U1.28(D28)
D29: C55.1 D89.C(CATHODE) R92.2 R93.1 U1.29(D29)
D30: C49.1 D79.C(CATHODE) R78.2 R83.1 U1.30(D30)
D31: C44.1 D69.C(CATHODE) R68.2 R73.1 U1.31(D31)
D32: C39.1 D59.C(CATHODE) R58.2 R63.1 U1.32(D32)
D33: C34.1 D49.C(CATHODE) R48.2 R53.1 U1.33(D33)
D34: C78.1 D137.C(CATHODE) R136.2 R140.1 U1.34(D34)
D35: C74.1 D129.C(CATHODE) R128.2 R132.1 U1.35(D35)
D36: C70.1 D120.C(CATHODE) R120.2 R124.1 U1.36(D36)
D37: C65.1 D110.C(CATHODE) R109.2 R114.1 U1.37(D37)
D38: C60.1 D100.C(CATHODE) R99.2 R104.1 U1.38(D38)
D39: C53.1 D90.C(CATHODE) R89.2 R94.1 U1.39(D39)
D40: C50.1 D80.C(CATHODE) R79.2 R84.1 U1.40(D40)
D41: C45.1 D70.C(CATHODE) R69.2 R74.1 U1.41(D41)
D42: C40.1 D60.C(CATHODE) R59.2 R64.1 U1.42(D42)
D43: C35.1 D50.C(CATHODE) R49.2 R54.1 U1.43(D43)
D44: C76.1 D135.C(CATHODE) R134.2 R138.1 U1.44(D44)
D45: C72.1 D127.C(CATHODE) R126.2 R130.1 U1.45(D45)
D46: C68.1 D118.C(CATHODE) R118.2 R122.1 U1.46(D46)
D47: C63.1 D108.C(CATHODE) R107.2 R112.1 U1.47(D47)
D48: C58.1 D98.C(CATHODE) R97.2 R102.1 U1.48(D48)
D49: C54.1 D88.C(CATHODE) R86.2 R87.1 U1.49(D49)
D50: C48.1 D78.C(CATHODE) R77.2 R82.1 U1.50(D50)
D51: C43.1 D68.C(CATHODE) R67.2 R72.1 U1.51(D51)
D52: C38.1 D58.C(CATHODE) R57.2 R62.1 U1.52(D52)
D53: C33.1 D48.C(CATHODE) R47.2 R52.1 U1.53(D53)
IRQ: K1.2(IRQ) U1.2(D2)
SCL: K1.3(SCL) L1.3(SCL) R36.1 R39.1 U1.81(SCL)
SDA: K1.4(SDA) L1.4(SDA) U1.80(SDA)
N18485002: D43.A J5.10
N18485012: D54.A J5.9
N18485022: D63.A J5.8
N18485032: D73.A J5.7
N18485042: D84.A J5.6
N18485052: D93.A J5.5
N18485062: D103.A J5.4
N18485072: D114.A J5.3
N18485082: D122.A J5.2
N18485092: D131.A J5.1
N18490587: U1.73(3.3V)
N18490594: C1.1 J3.1 R1.2 U1.72(RESET)
N18490757: R2.2 U1.79(AREF)
N18497423: D33.A(ANODE) U2.1 V2.1
N18498799: C20.1 C21.1 C22.1 D33.C(CATHODE) F2.1
N18511942: D133.A J6.1
N18511944: D125.A J6.2
N18511946: D116.A J6.3
N18511956: D105.A J6.4
N18511958: D95.A J6.5
N18511960: D83.A J6.6
N18511962: D75.A J6.7
N18511964: D65.A J6.8
N18511966: D55.A J6.9
N18511968: D45.A J6.10
N18511970: D45.C(K) R54.2
N18511972: D55.C(K) R64.2
N18511974: D65.C(K) R74.2
N18511976: D75.C(K) R84.2
N18511978: D83.C(K) R94.2
N18511980: D95.C(K) R104.2
N18511982: D105.C(K) R114.2
N18511984: D116.C(K) R124.2
N18511986: D125.C(K) R132.2
N18511988: D133.C(K) R140.2
N18513980: D132.A J7.1
N18513982: D123.A J7.2
N18513984: D115.A J7.3
N18513994: D104.A J7.4
N18513996: D94.A J7.5
N18513998: D85.A J7.6
N18514000: D74.A J7.7
N18514002: D64.A J7.8
N18514004: D53.A J7.9
N18514006: D44.A J7.10
N18531082: D130.A J8.1
N18531084: D121.A J8.2
N18531102: D113.A J8.3
N18531104: D102.A J8.4
N18531106: D92.A J8.5
N18531108: D82.A J8.6
N18531118: D72.A J8.7
N18531120: D62.A J8.8
N18531122: D52.A J8.9
N18531124: D42.A J8.10
N18534099: D107.A J4.1
N18534101: D97.A J4.2
N18534119: D87.A J4.3
N18534121: D77.A J4.4
N18534123: D67.A J4.5
N18534125: D57.A J4.6
N18534135: D47.A J4.7
N18534137: D39.A J4.8
N18534139: D37.A J4.9
N18534141: D35.A J4.10
N18537258: D7.A J2.1
N18537260: D8.A J2.2
N18537262: D9.A J2.3
N18537272: D10.A J2.4
N18537274: D11.A J2.5
N18537276: D12.A J2.6
N18537278: D13.A J2.7
N18537280: D14.A J2.8
N18537282: D15.A J2.9
N18537284: D16.A J2.10
N18542223: D1.A J1.1
N18542237: D4.A J1.4
N18542239: D5.A J1.5
N18542365: C2.2 C3.2 C4.2 C5.2 C6.2 C7.2 D17.A(ANODE) D18.A(ANODE) D19.A(ANODE) D20.A(ANODE) D21.A(ANODE) D22.A(ANODE) R19.1 R20.1 R21.1 R22.1 R23.1 R24.1
N18547707: D34.A U3.4(OUT_P)
N18565427: Q1.1(GATE) R40.2
N18565563: LS1.1(A) Q1.3(DRAIN)
N18634606: D43.C(K) R52.2
N18634608: D54.C(K) R62.2
N18634610: D63.C(K) R72.2
N18634612: D73.C(K) R82.2
N18634614: D84.C(K) R87.2
N18634616: D93.C(K) R102.2
N18634618: D103.C(K) R112.2
N18634620: D114.C(K) R122.2
N18634622: D122.C(K) R130.2
N18634624: D131.C(K) R138.2
N18639403: D44.C(K) R53.2
N18639405: D53.C(K) R63.2
N18639407: D64.C(K) R73.2
N18639409: D74.C(K) R83.2
N18639411: D85.C(K) R93.2
N18639413: D94.C(K) R103.2
N18639415: D104.C(K) R113.2
N18639417: D115.C(K) R123.2
N18639419: D123.C(K) R131.2
N18639421: D132.C(K) R139.2
N18642150: D42.C(K) R50.2
N18642152: D52.C(K) R60.2
N18642154: D62.C(K) R70.2
N18642156: D72.C(K) R80.2
N18642158: D82.C(K) R90.2
N18642160: D92.C(K) R100.2
N18642162: D102.C(K) R110.2
N18642164: D113.C(K) R121.2
N18642166: D121.C(K) R129.2
N18642168: D130.C(K) R137.2
N18644969: D35.C(K) R38.2
N18644971: D37.C(K) R42.2
N18644973: D39.C(K) R44.2
N18644975: D47.C(K) R55.2
N18644977: D57.C(K) R65.2
N18644979: D67.C(K) R75.2
N18644981: D77.C(K) R85.2
N18644983: D87.C(K) R95.2
N18644985: D97.C(K) R105.2
N18644987: D107.C(K) R115.2
N18671779: D6.C(K) R8.2
N18671947: D5.C(K) R7.2
N18672127: D4.C(K) R6.2
N18672321: D3.C(K) R5.2
N18672528: D2.C(K) R4.2
N18672748: D1.C(K) R3.2
N18672983: D16.C(K) R18.2
N18673191: D15.C(K) R17.2
N18673413: D14.C(K) R16.2
N18673648: D13.C(K) R15.2
N18673896: D12.C(K) R14.2
N18674160: D11.C(K) R13.2
N18674398: D10.C(K) R12.2
N18675512: D9.C(K) R11.2
N18676637: D8.C(K) R10.2
N18677776: D7.C(K) R9.2
N18768788: R141.1 U1.71(IOREF)
N18822314: D2.A J1.2
N18822323: D3.A J1.3
N18822355: D6.A J1.6
N185630101: LS1.2(B) R35.1

Pads without a net: J3 2 3

## Text on the board
PAGE_OUTLINE: DIMENSIONS IN MM | B | PCB RevB | SDI-12_ULTRASONIC LEVEL SENSOR | 20170515
DIMENSION: SECONDARY SIDE LAYER4 (18Um) | CORE              (1600Um) | PRIMARY SIDE LAYER1 (18Um) | 10.ALL BOARDS MUST BE ELECTRICALLY TESTED | 6.100% CONTINUTY TESTING USING DATABASE NETLIST SHALL BE | 7.LOGO AND DATEMARK NEGATIVE IN SOLDER MASK | 8.BOW AND TWIST | 9.MINIMUM CONDUCTER WIDTH IS 0.2MM | 5.SILK SCREEN LEGEND WILL NOT TO BE APPLIED. | SHALL NOT EXCEED 0.7% OF LONGEST SIDE. | 4. | 3.SURFACE FINISH:  LEAD FREE HAL | 1.FABRICATE PER IPC-6012A CLASS2 | 2.MATERIAL | SOLDER MASK MATERIAL SHALL MEET ALL REQUIREMENTS OF | COPPER. | PERFORMED. | IPC-SM-840C AND SHALL BE GREEN IN COLOR AND APPLIED OVER BASE | MINIMUM SPACING IS 0.15MM. | NOTES:UNLESS OTHERWISE SPECIFIED. | COPPER AS PER STACKUP | DIELECTRIC:FR4 PER IPC-4101 | UL.RATING | 94-0 MINIMUM | 1.6MM+/-10%
User.6: FILM LAYER: | PART NO/CARD REF:   LEVEL SENSOR | DAY :       15/05/2017 | RevB
User.8: SILKSCREEN-TOP
User.9: SOLDER MASK SECONDARY
User.10: SOLDER MASK PRIMARY
User.11: PASTEMASK BOTTOM
User.12: PRIMARY SIDE PASTEMASK
User.13: FABRICATION LAYER
User.14: PRIMARY SIDE
User.15: LAYER2-UNUSED1
User.16: LAYER2-SIGNAL1
User.17: LAYER3-SIGNL2
User.18: LAYER5-UNUSED2
User.19: SECONDARY SIDE
User.20: ASSEMBLY PRIMARY SIDE
User.21: ASSEMBLY SECONDARY SIDE
User.28: FIGURE | SIZE | 0.3 | 1.0 | 1.2 | 4.5 | DRILL CHART: TOP to BOTTOM | ALL UNITS ARE IN MILLIMETERS | TOLERANCE | +0.0/-0.0 | +0.08/-0.08 | PLATED | NON-PLATED | QTY | 511 | 4 | 8
